# Altium PCB INDUCTANCE_METER.PcbDoc
Units mil, origin at the board's own origin, x right, y up, seen from the top; angles counter-clockwise.
Board outline 1900 x 800 mil, 2 copper layers (Top Layer, Bottom Layer); 8 components, 8 nets, 24 pads, 0 vias.
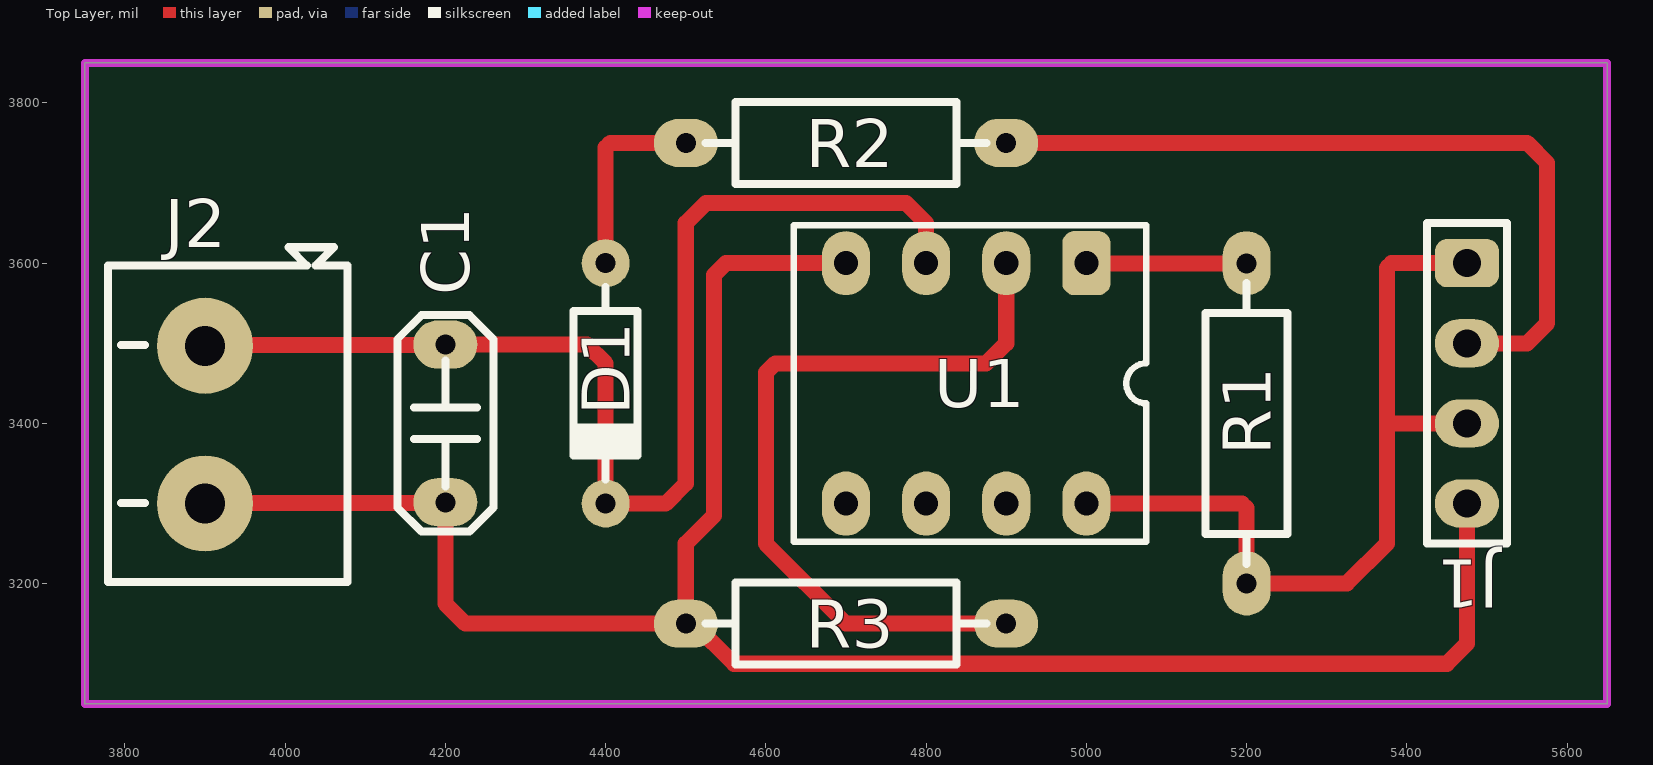
[diagram p0: Top Layer view]
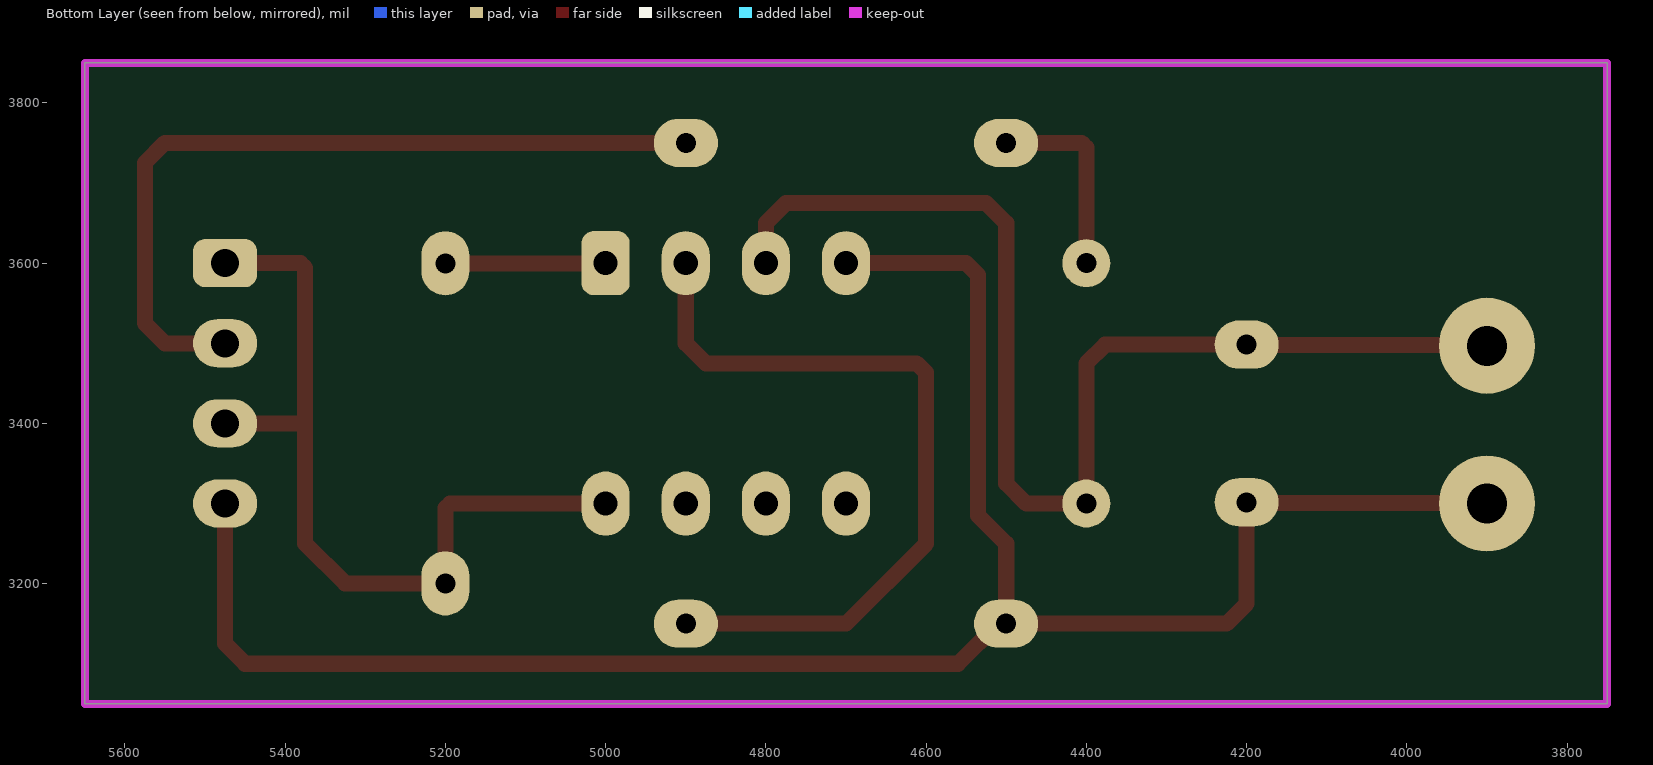
[diagram p1: Bottom Layer view, seen from below]
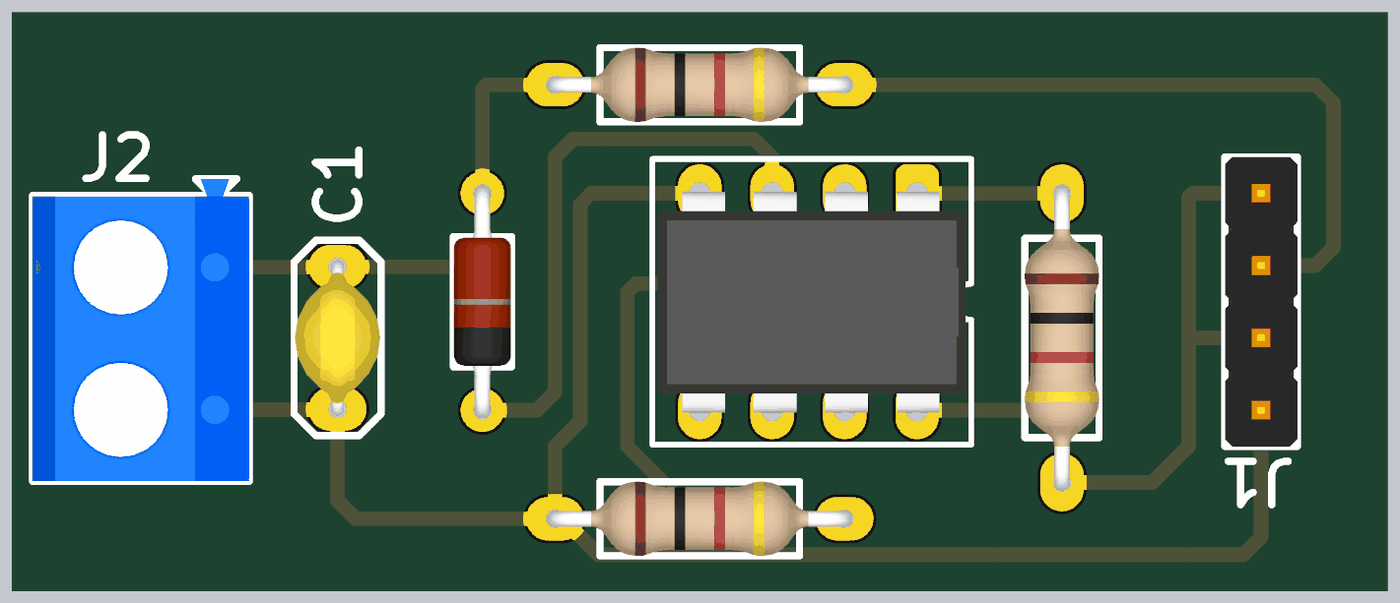
[diagram p2: 3D render of the assembled board from above, using the file's embedded part models]

## Layer stack, top to bottom
Top Solder: solder mask 0.4, Solder Resist, Dk 3.5
Top Layer: signal copper 1.4
Dielectric 1: dielectric 12.6, FR-4, Dk 4.8
Bottom Layer: signal copper 1.4
Bottom Solder: solder mask 0.4, Solder Resist, Dk 3.5

## Board outline
3750,3050 5650,3050 5650,3850 3750,3850

## Design rules (kind name [scope] priority, off if disabled: settings)
Clearance [All] p1: gap=10 ignorepadtopadclearanceinfootprint=FALSE except(0: Arc-Hole Track-Hole SMDPad-Hole THPad-Hole Via-Hole Fill-Hole Poly-Hole Region-Hole Text-Hole)
PolygonConnect [All] p1: connectstyle=Relief reliefconductorwidth=10 reliefentries=4 polygonreliefangle="90 Angle" airgapwidth=10
RoutingVias [All] p1: holewidth=28 width=50 viastyle="Through Hole" minholewidth=28 minwidth=50 maxholewidth=28 maxwidth=50
SolderMaskExpansion [All] p1: expansion=4 istentingtop=FALSE
Width [All] p1: maxlimit=50 minlimit=10 preferedwidth=30
30 further rules are at their usual default settings.

## Components (designator, comment, footprint, x,y, rotation, side; value= is the part's Value field where it differs from the comment)
C1 "1uF" CAP_DISC_4x3_YL 4200,3400 r90 top
D1 "1N4148" DO-204AH-RD 4400,3450 r270 top
J1 "ARDUINO" HEADER-MALE-04PINS-2.54MM 5475,3600 r270 top
J2 "INDUCTOR" DG306-5.0-02P-12-00AH 3900,3398.43 r270 top
R1 "1K" RES-0.25W-H-CF 5200,3400 r270 top
R2 "150R" RES-0.25W-H-CF 4700,3750 r0 top
R3 "1K" RES-0.25W-H-CF 4700,3150 r0 top
U1 "LM358" DIP-8 4862.2,3452.36 r270 top

## Footprints (in the part's own frame and the unit in brackets; to place one, negate y for a bottom-side part, rotate by r counter-clockwise, add the part's x,y. Pads: shape width x height; smd on the part's side, far side on the other; paste and mask are expansions set on the pad)
CAP_DISC_4x3_YL [mil]
  oval 60x80 hole 25: 1(-98.44,0) 2(98.44,0)
  silkscreen extent -135,-60 135,60, body extent -107,-59 107,59, height 215
DG306-5.0-02P-12-00AH [mil] "• Current rating: 10 A AC/DC  • Voltage rating: 300 V AC/DC  • Temperature range: -30° ~ +120°  • Applicable wire: 22-14AWG UL (0.5 - 1.5mm² IEC)"
  round 120 hole 50: 1(-98.43,0) 2(98.43,0)
  silkscreen extent -221,-121 197,178, body extent -221,-121 196,178, height 394
DIP-8 [mil]
  rrect50% 80x60 hole 30: 1(-147.64,137.8)
  oval 80x60 hole 30: 2(-147.64,37.8) 3(-147.64,-62.2) 4(-147.64,-162.2) 5(152.36,-162.2) 6(152.36,-62.2) 7(152.36,37.8) 8(152.36,137.8)
  silkscreen extent -195,-227 200,213, body extent -150,-220 156,205, height 177
DO-204AH-RD [mil]
  round 60 hole 25: 1(-150,0) 2(150,0)
  silkscreen extent -120,-40 120,40, body extent -161,-39 161,39, height 82
HEADER-MALE-04PINS-2.54MM [mil]
  rrect50% 60x80 hole 35: 1(0,0)
  oval 60x80 hole 35: 2(100,0) 3(200,0) 4(300,0)
  silkscreen extent -50,-50 350,50, body extent -50,-50 350,50, height 350
RES-0.25W-H-CF [mil]
  oval 80x60 hole 25: 1(-199.8,0) 2(199.8,0.01)
  silkscreen extent -175,-51 175,51, body extent -211,-51 211,51, height 106

## Part data
C1: library part Capacitors(Disc)
D1: library part Diode-1N4148
J1: library part HEADER-MALE-04PINS-2.54MM
J2: library part DG306-5.0-02P-12-00AH
R1 R2 R3: library part "Resistors THD"
U1: library part Oamp-LM358

## Nets (pads, with @x,y where several pads share a name; then routed paths per layer and width w, separated by ;. In a path a pad name is that pad's centre, name@x,y a point inside that pad or via, vN(x,y) a via of type N, cw(c..) or ccw(c..) an arc to the next point about the centre after c; other vN are vias at no path point)
GND: C1.1 J1.4 J2.2 R3.1 U1.4 | length 2539.4
  Top Layer w20: J2.2 3900.78,3300.78 4199.22,3300.78 C1.1 4200,3175 4225,3150 R3.1 ; U1.4 4550,3600 4535,3585 4535,3285 4500,3250 4500,3150.2 R3.1 ; J1.4 5475,3125 5450,3100 4560.2,3100 4510.2,3150 R3.1
NetC1_2: C1.2 D1.2 J2.1 U1.3 | length 1491.4
  Top Layer w20: J2.1 3900.8,3497.65 4199.2,3497.65 C1.2 4376.56,3498.44 4400,3475 D1.2 4475,3300 4500,3325 4500,3650 4525,3675 4775,3675 4800,3650 U1.3
NetD1_1: D1.1 R2.1 | length 246.8
  Top Layer w20: D1.1 4400,3744.14 4405.86,3750 R2.1
NetD2_1: 
NetJ1_2: J1.2 R2.2 | length 995.9
  Top Layer w20: R2.2 5549.99,3750.01 5575,3725 5575,3525 5550,3500 J1.2
NetR1_1: R1.1 U1.1 | length 200.1
  Top Layer w20: U1.1 5000.2,3599.8 R1.1
NetR3_2: R3.2 U1.2 | length 969.7
  Top Layer w20: R3.2 4699.99,3150.01 4600,3250 4600,3463.28 4611.72,3475 4875,3475 4900,3500 U1.2
VCC: J1.1 J1.3 R1.2 U1.8 | length 1041
  Top Layer w20: U1.8 5194.15,3300 5200.01,3294.14 R1.2 5325.2,3200.2 5375,3250 5375,3405.86 ; J1.3 5380.86,3400 5375,3405.86 ; J1.1 5380.86,3600 5375,3594.14 5375,3405.86
pads on no net: U1.5 U1.6 U1.7

## Keep-outs
Keep-Out Layer:
  the board outline again, w10